# Altium PCB 435MHz_LNA.PcbDoc
Units mil, origin at the board's own origin, x right, y up, seen from the top; angles counter-clockwise.
Board outline 1897.64 x 1078.74 mil, 2 copper layers (Top Layer, Bottom Layer), stack 26.422 mil thick; 58 components, 24 nets, 174 pads, 479 vias.
Unrouted connection lines stored in the file: 1.
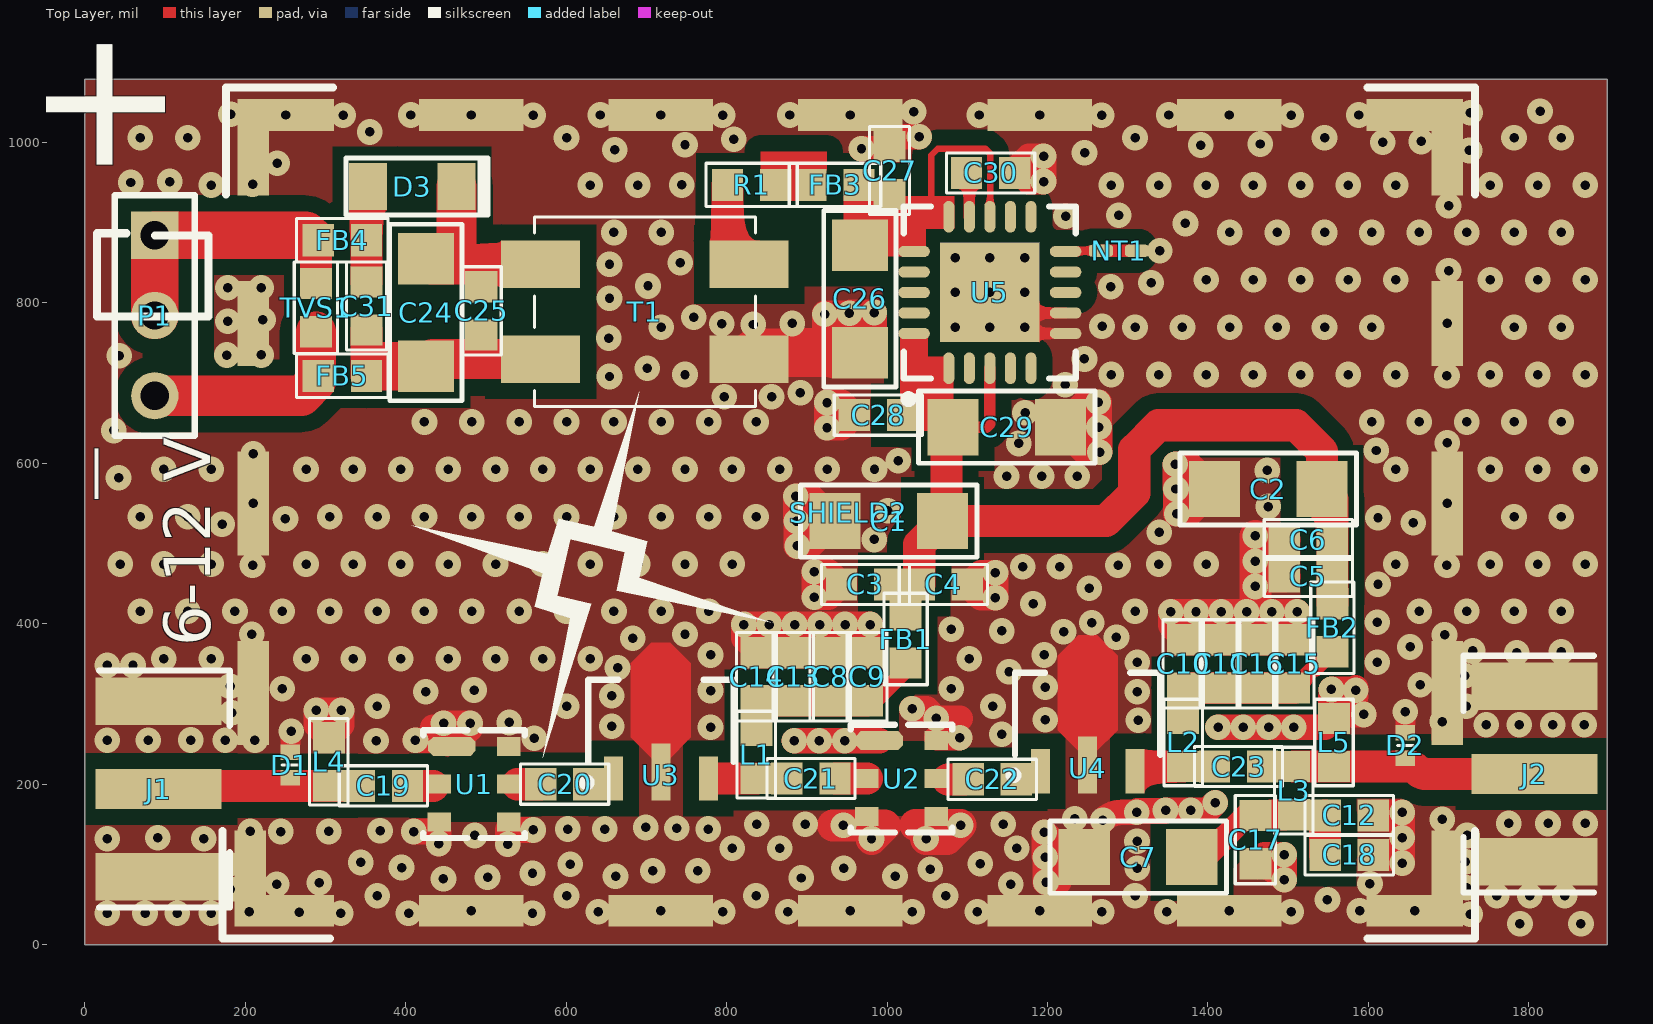
[diagram p0: Top Layer view]
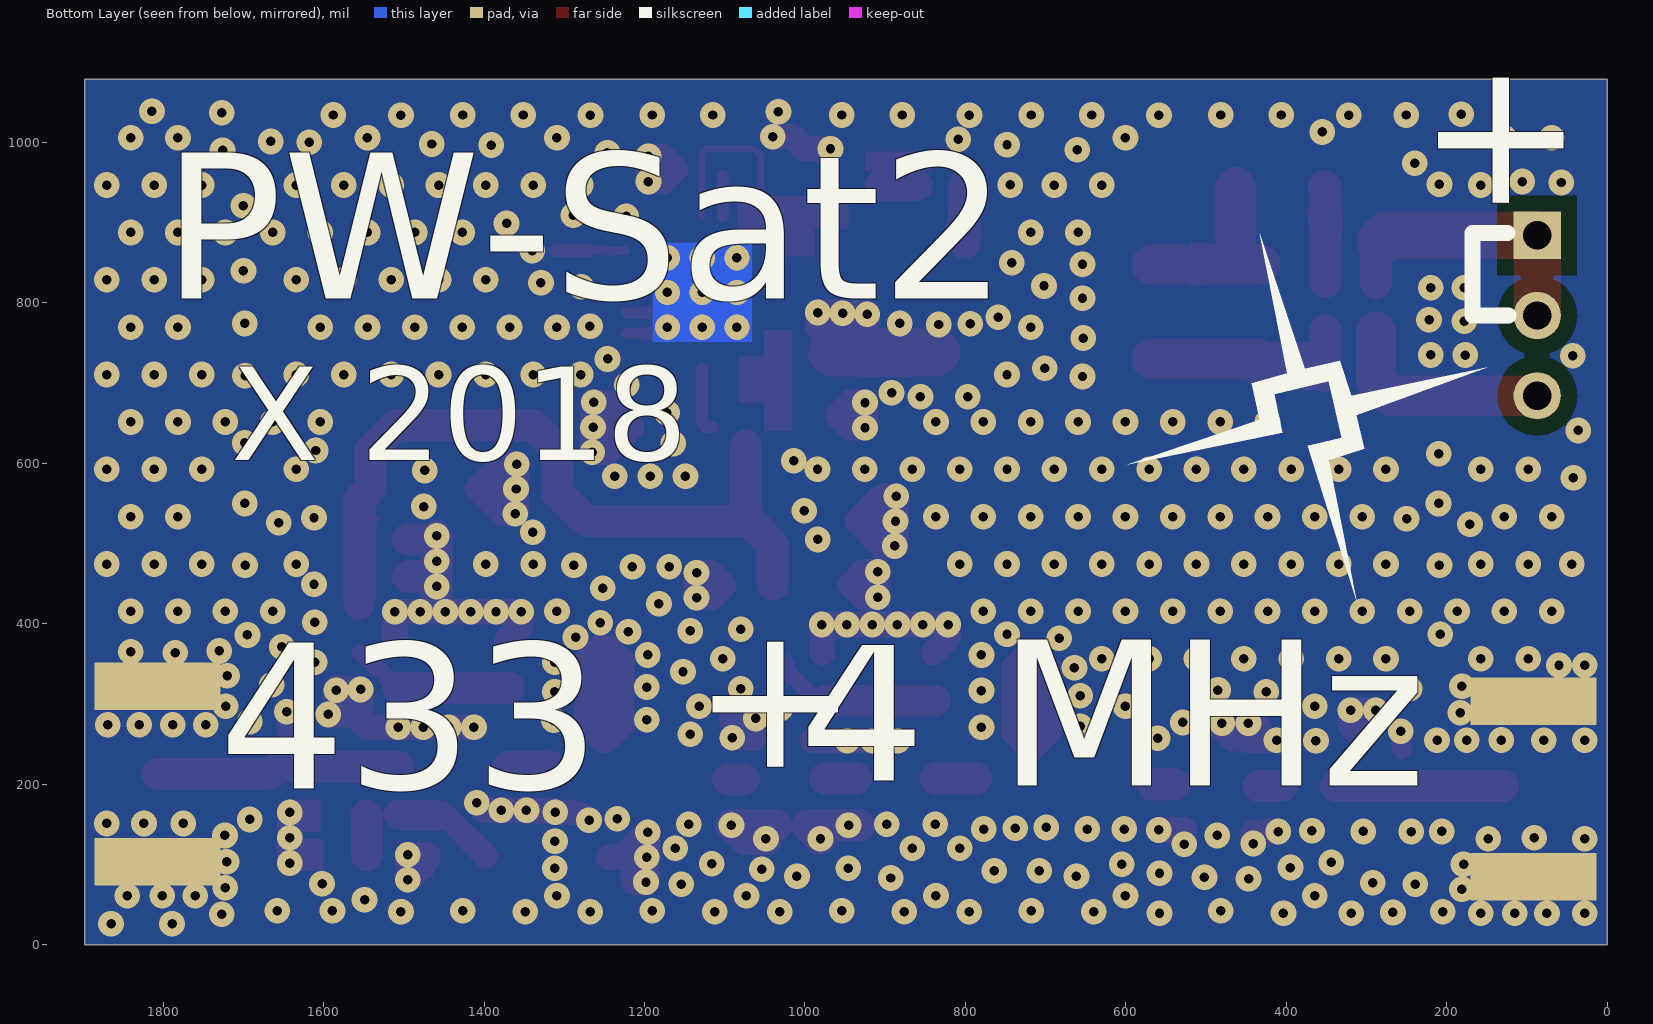
[diagram p1: Bottom Layer view, seen from below]
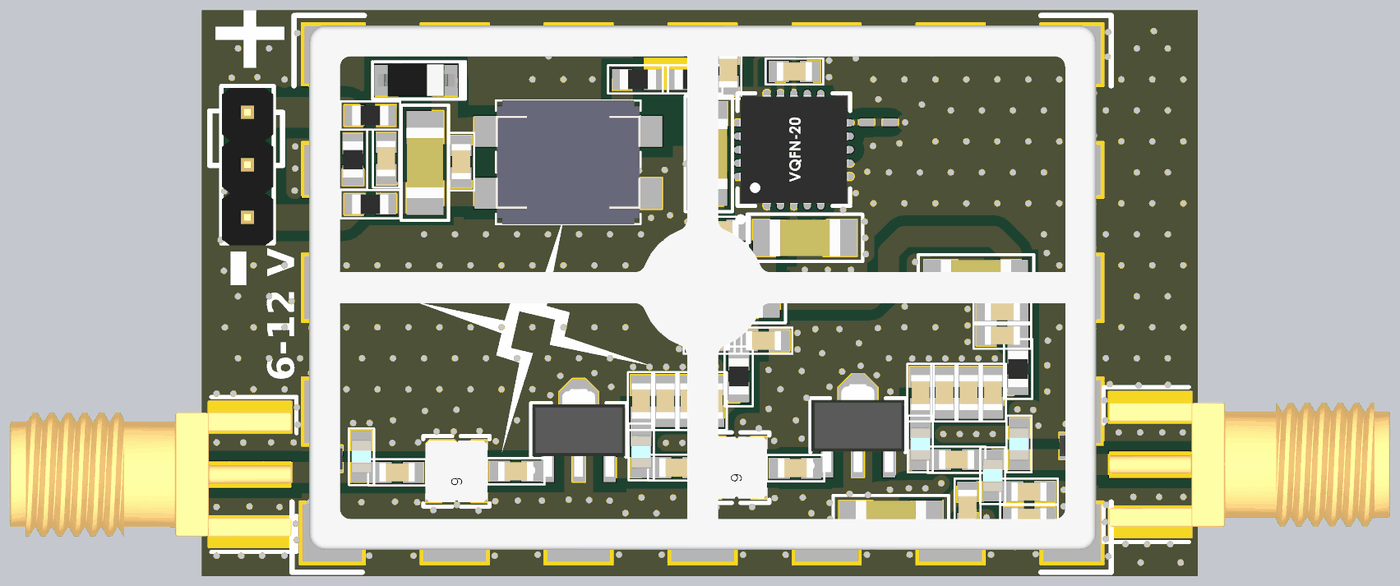
[diagram p2: 3D render of the assembled board from above, using the file's embedded part models]

## Layer stack, top to bottom
Top Solder: solder mask 0.4, Solder Resist, Dk 3.5
Top Layer: signal copper 1.4
Dielectric 1: core 23.622, FR-4, Dk 4.2
Bottom Layer: signal copper 1.4
Bottom Solder: solder mask 0.4, Solder Resist, Dk 3.5

## Board outline
0,0 0,1078.74 1897.64,1078.74 1897.64,0

## Design rules (kind name [scope] priority, off if disabled: settings)
AssemblyTestPointUsage [All] p1 off:
AssemblyTestpoint [All] p1 off: testpointundercomponent=TRUE minsize=40 maxsize=100 preferedsize=60 minholesize=0 maxholesize=40 preferedholesize=32 testpointgrid=1 usegrid=TRUE gridtolerance=0.01 allowsidetop=TRUE allowsidebottom=TRUE
Clearance [All] p1: gap=6 ignorepadtopadclearanceinfootprint=FALSE except(20: Arc-Poly Track-Poly SMDPad-Poly THPad-Poly Via-Poly Fill-Poly Poly-Poly Poly-Region Poly-Text Poly-Hole)
ComponentClearance R3_R4 [InComponent('R3') vs InComponent('R4')] p1: gap=0 collisioncheckmode=3 verticalgap=0 showdistances=FALSE
ComponentClearance R1_R2 [InComponent('R1') vs InComponent('R2')] p2: gap=0 collisioncheckmode=3 verticalgap=0 showdistances=FALSE
ComponentClearance ComponentClearance_PAD_08mm [HasFootprint('PAD_08mm')] p3: gap=0 collisioncheckmode=3 verticalgap=0 showdistances=FALSE
ComponentClearance ComponentClearance_1 [All vs InComponent('J4')] p4: gap=0 collisioncheckmode=3 verticalgap=0 showdistances=FALSE
ComponentClearance [All] p5: gap=10 collisioncheckmode=3 verticalgap=10 showdistances=FALSE
FabricationTestPointUsage [All] p1 off: valid=0 allowmultiple=FALSE
FabricationTestpoint [All] p1 off: side=3 testpointundercomponent=TRUE minsize=40 maxsize=100 preferedsize=60 minholesize=0 maxholesize=40 preferedholesize=32 testpointgrid=1 allowsidetop=TRUE allowsidebottom=TRUE usegrid=TRUE gridtolerance=0.01
Length "InNet('USBDP_CON') Or InNet('USBDM_CON')" [InNet('USBDP_CON') Or InNet('USBDM_CON')] p1: maxlimit=650 minlimit=550
MinimumSolderMaskSliver MSOP8_TSSOP8_3X3 [HasFootprint('MSOP8_TSSOP8_3X3')] p1: minsoldermaskwidth=3
MinimumSolderMaskSliver DFN8_3.0x2.0 [HasFootprint('DFN8_3.0x2.0')] p2: minsoldermaskwidth=3
MinimumSolderMaskSliver 6L2MM [HasFootprint('6L2MM')] p3: minsoldermaskwidth=3
MinimumSolderMaskSliver QFN16_3x3 [HasFootprint('QFN16_3x3')] p4: minsoldermaskwidth=3
MinimumSolderMaskSliver 0915LP15B026 [HasFootprint('0915LP15B026')] p5: minsoldermaskwidth=3
MinimumSolderMaskSliver PD0810J5050S2HF [HasFootprint('PD0810J5050S2HF')] p6: minsoldermaskwidth=3
MinimumSolderMaskSliver [All] p7: minsoldermaskwidth=6
PlaneClearance [All] p1: clearance=9.84
PlaneConnect PlaneConnect_via [All] p1: planeconnectstyle=Direct reliefexpansion=20 reliefentries=4 reliefconductorwidth=10 reliefairgap=10
PlaneConnect [All] p2: planeconnectstyle=Relief reliefexpansion=20 reliefentries=4 reliefconductorwidth=10 reliefairgap=10
PolygonConnect PolygonConnect_1 [HasFootprint('BMI-S-205-F')] p1: connectstyle=Direct reliefconductorwidth=10 reliefentries=4 polygonreliefangle="90 Angle" airgapwidth=10
PolygonConnect PolygonConnect_via [isVia] p2: connectstyle=Direct reliefconductorwidth=10 reliefentries=4 polygonreliefangle="90 Angle" airgapwidth=10
PolygonConnect [All] p3: connectstyle=Direct reliefconductorwidth=20 reliefentries=4 polygonreliefangle="90 Angle" airgapwidth=12
RoutingVias [All] p1: holewidth=5.91 width=21.65 viastyle="Through Hole" minholewidth=7.87 minwidth=23.62 maxholewidth=39.37 maxwidth=50
SilkToSilkClearance [All] p1: silktosilkclearance=1
SilkToSolderMaskClearance [IsPad] p1: minsilkscreentomaskgap=0 clearancetoexposedcopper=TRUE
SolderMaskExpansion [All] p1: expansion=2
Width Width_50ohm [InNetClass('50 ohm')] p1: maxlimit=40 minlimit=40 preferedwidth=40 bottomlayer_minwidth=0 bottomlayer_maxwidth=0 bottomlayer_prefwidth=0 minimp=40.000000 maximp=69.000000 favimp=50.000000
Width [All] p2: maxlimit=118.11 minlimit=5.91 preferedwidth=9.84
20 further rules are at their usual default settings.

## Classes and differential pairs
net class "50 ohm": NetC19_1 NetC19_2 NetC20_1 NetC20_2 NetC21_1 NetC21_2 NetC22_1 NetC22_2 NetC23_1 NetC23_2

## Components (designator, comment, footprint, x,y, rotation, side; value= is the part's Value field where it differs from the comment)
C1 "Ceramic X7R" C_1206_3216 1002.13,527.91 r180 top value=10uF
C2 "Ceramic X7R" C_1206_3216 1475.13,567.91 r180 top value=10uF
C3 "Ceramic X7R" C_0603_1608 973.13,448.91 r0 top value=1uF
C4 "Ceramic C0G" C_0603_1608 1070.13,448.91 r0 top value=1nF
C5 "Ceramic X7R" C_0603_1608 1525.13,458.91 r0 top value=1uF
C6 "Ceramic C0G" C_0603_1608 1525.13,504.91 r180 top value=1nF
C7 "Ceramic X7R" C_1206_3216 1313,109 r0 top value=10uF
C8 "Ceramic C0G" C_0603_1608 929.13,333.91 r270 top value=100pF
C9 "Ceramic X7R" C_0603_1608 975.13,333.91 r90 top value=1uF
C10 "Ceramic C0G" C_0603_1608 1369.13,349.91 r270 top value=100pF
C11 "Ceramic X7R" C_0603_1608 1415.13,349.91 r90 top value=1uF
C12 "Ceramic X7R" C_0603_1608 1576.13,160.91 r0 top value=1uF
C13 "Ceramic C0G" C_0603_1608 883.13,333.91 r270 top value=1nF
C14 "Ceramic X7R" C_0603_1608 837.13,333.91 r90 top value=100nF
C15 "Ceramic C0G" C_0603_1608 1507.13,349.91 r270 top value=1nF
C16 "Ceramic X7R" C_0603_1608 1461.13,349.91 r90 top value=100nF
C17 "Ceramic C0G" C_0603_1608 1459.13,130.91 r90 top value=1nF
C18 "Ceramic X7R" C_0603_1608 1576.13,111.91 r0 top value=100nF
C19 "Ceramic C0G" C_0603_1608 372.13,197.91 r0 top value=100pF
C20 "Ceramic C0G" C_0603_1608 598.13,199.91 r0 top value=100pF
C21 "Ceramic C0G" C_0603_1608 905.13,206.91 r0 top value=100pF
C22 "Ceramic C0G" C_0603_1608 1131.13,206.04 r0 top value=100pF
C23 "Ceramic C0G" C_0603_1608 1438.13,221.91 r0 top value=100pF
C24 "Ceramic X7R" C_1206_3216 425.13,787.91 r270 top value=10uF
C25 "Ceramic X7R" C_0603_1608 494.13,789.91 r270 top value=100nF
C26 "Ceramic X7R" C_1206_3216 966.13,804.91 r270 top value=10uF
C27 "Ceramic X7R" C_0603_1608 1003.13,964.91 r90 top value=100nF
C28 "Ceramic X7R" C_0603_1608 989.13,659.91 r180 top value=100nF
C29 "Ceramic X7R" C_1206_3216 1149.13,644.91 r0 top value=10uF
C30 "Ceramic X7R" C_0603_1608 1129.13,961.91 r0 top value=1uF
C31 "Ceramic C0G" C_0603_1608 351,796 r270 top value=100pF
D1 "ESD Suppressors / TVS Diodes" D_BI_0402_1005 256.13,223.73 r90 top value=PS04LTVA1
D2 "ESD Suppressors / TVS Diodes" D_BI_0402_1005 1646.13,248.21 r90 top value=PS04LTVA1
D3 "1N4148W" SOD123 408,945 r180 top value=LL4148
FB1 "Ferrite bead" FB_0603_1608 1023.13,380.91 r270 top value=BLM18AG601SN1
FB2 "Ferrite bead" FB_0603_1608 1555.13,394.91 r270 top value=BLM18AG601SN1
FB3 "Ferrite bead" FB_0603_1608 935.13,946.91 r0 top value=BLM18AG601SN1
FB4 "Ferrite bead" FB_0603_1608 321,878 r0 top value=BLM18AG601SN1
FB5 "Ferrite bead" FB_0603_1608 321,709 r180 top value=BLM18AG601SN1
J1 "SMA EDGE" J_SMA_EDGE_6.25 13.13,193.91 r0 top value=RF2-143-T-17-50-G
J2 "SMA EDGE" J_SMA_EDGE_6.25 1885.83,212.6 r180 top value=RF2-143-T-17-50-G
L1 "L" L_0603_1608 837.13,236.91 r90 top value=NC
L2 "L" L_0603_1608 1369.13,251.91 r90 top value=NC
L3 "L" L_0603_1608 1507.13,191.91 r270 top value=NC
L4 "Inductor" L_0603_1608 304.13,227.91 r270 top value=100nH
L5 "Inductor" L_0603_1608 1557.13,251.91 r270 top value=100nH
NT1 "NETTIE 15MIL" NT_15MIL 1289.13,864.91 r180 top net-tie value=NT_15MIL
P1 "Goldpin" P_HEADER_1x3_2.54 87.15,884.18 r270 top value=DS1021-1*3SF1-1
R1 "Resistor" R_0603_1608 831.13,946.91 r0 top value=0R
SHIELD1 "EMI Shield Cover" BMI-S-205-C 1976,3152 r180 top value=BMI-S-205-C
SHIELD2 "EMI Shield" BMI-S-205-F 954.22,549.91 r0 top locked value=BMI-S-205-F
T1 "Common mode filter" ACM7060 698.13,788.91 r0 top value=ACM7060-301-2PL-TL
TVS1 "0603ESDA2" R_0603_1608 288,794 r270 top value=0603ESDA2-TR2
U1 "TA0649A" SAW_DCC6_SM3030-6_3x3 485.13,199.91 r270 top
U2 "TA0649A" SAW_DCC6_SM3030-6_3x3 1018.13,206.91 r270 top
U3 "PGA103+" SOT89_TO-243AA_N 718.13,277.97 r0 top value=PGA-103+
U4 "PGA103+" SOT89_TO-243AA_N 1250.13,286.91 r0 top value=PGA-103+
U5 "TPS7A4701RGWR" QFN20_5x5 1128.13,812.91 r90 top

## Footprints (in the part's own frame and the unit in brackets; to place one, negate y for a bottom-side part, rotate by r counter-clockwise, add the part's x,y. Pads: shape width x height; smd on the part's side, far side on the other; paste and mask are expansions set on the pad)
ACM7060 [mm] "TDK Common Mode Filters ACM7060 Series"
  rect 2.5x1.5 smd: 1(-3.3,1.5) 2(-3.3,-1.5) 3(3.3,-1.5) 4(3.3,1.5)
  silkscreen extent -3.5,-3 3.5,3, body extent -3.5,-3 3.5,3, height 3.5
BMI-S-205-C [mil]
  body extent -759,-509 759,509, height 256
BMI-S-205-F [mm]
  rect 1x3.05 smd paste-0.127: 1(-19,-11.875) 1(-18.9,11.275) 1(18.9,-11.875) 1(18.9,11.275)
  rect 1x3.3 smd paste-0.127: 1(-18.9,-6) 1(-18.9,0) 1(18.9,-6) 1(18.9,0)
  rect 1x2.7 smd paste-0.127: 1(-18.9,5.7) 1(18.9,5.7)
  rect 3.15x1 smd paste-0.127: 1(-17.925,-12.9)
  rect 3.05x1 smd paste-0.127: 1(-17.875,12.3) 1(17.875,-12.9) 1(17.875,12.3)
  rect 3.3x1 smd paste-0.127: 1(-12,-12.9) 1(-12,12.3) 1(-6,-12.9) 1(-6,12.3) 1(0,-12.9) 1(0,12.3) 1(6,-12.9) 1(6,12.3) 1(12,-12.9) 1(12,12.3)
  silkscreen extent -19.87,-13.78 19.77,13.18, body extent -19.05,-12.7 19.05,12.7, height 6
C_0603_1608 [mil]
  rect 39x40 smd: 1(-30,0) 2(30,0)
  silkscreen extent -55,-25 55,25, body extent -33,-18 33,18, height 35
C_1206_3216 [mil]
  rect 64x70 smd: 1(-67,0) 2(67,0)
  silkscreen extent -110,-45 110,45, body extent -67,-35 67,35, height 39
D_BI_0402_1005 [mm]
  rect 0.49x0.62 smd: 1(-0.405,0) 2(0.405,0)
  silkscreen extent 0,-0.25 0,0.25, body extent -0.5,-0.3 0.5,0.3, height 0.48
FB_0603_1608 [mil]
  rect 39x40 smd: 1(-30,0) 2(30,0)
  silkscreen extent -57,-27 57,27, body extent -34,-19 34,19, height 21
J_SMA_EDGE_6.25 [mm]
  rect 4x1.27 smd paste-5: 1(2,0)
  rect 4x1.5 smd paste-5: 2(2,-2.775) 2(2,2.775)
  rect 4x1.5 smd far side paste-5: 2(2,-2.775) 2(2,2.775)
  silkscreen extent 0.13,-3.75 4.25,3.75, body extent -9.6,-3 4,3, height 3.5
L_0603_1608 [mil]
  rect 39x40 smd: 1(-30,0) 2(30,0)
  silkscreen extent -54,-24 54,24, body extent -31,-20 32,20, height 31
NT_15MIL [mil]
  rrect50% 30x15 smd: 1(-22.5,0) 2(22.5,0)
  Top Layer lines w15: 22.5,0 -22.5,0
P_HEADER_1x3_2.54 [mm] "Connector; Header; 3 Position, Male"
  rect 1.5x1.5 hole 0.9: 1(0,0)
  round 1.5 hole 0.9: 2(2.54,0) 3(5.08,0)
  silkscreen extent -1.27,-1.27 6.35,1.27, body extent -1.17,-1.25 6.45,1.25, height 8.2
QFN20_5x5 [mm] "QFN, 20-Leads, Body 5,00x5,00mm, Pitch 0,65mm, Thermal Pad 3,15x3,15mm, IPC Medium Density"
  oval 1x0.35 smd: 1(-2.4,1.3) 2(-2.4,0.65) 3(-2.4,0) 4(-2.4,-0.65) 5(-2.4,-1.3) 11(2.4,-1.3) 12(2.4,-0.65) 13(2.4,0) 14(2.4,0.65) 15(2.4,1.3)
  oval 0.35x1 smd: 6(-1.3,-2.4) 7(-0.65,-2.4) 8(0,-2.4) 9(0.65,-2.4) 10(1.3,-2.4) 16(1.3,2.4) 17(0.65,2.4) 18(0,2.4) 19(-0.65,2.4) 20(-1.3,2.4)
  rect 3.15x3.15 smd: 21(0,0)
  Bottom Layer region: -1.575,-1.575 1.575,-1.575 1.575,1.575 -1.575,1.575
  silkscreen extent -3.5,-2.72 2.73,2.73, body extent -2.62,-2.62 2.63,2.63, height 1.05
R_0603_1608 [mil]
  rect 39x40 smd: 1(-30,0) 2(30,0)
  silkscreen extent -57,-27 57,27, body extent -34,-19 34,19, height 21
SAW_DCC6_SM3030-6_3x3 [mm]
  oct 0.6x1.5 smd: 1(-1.2,-0.7)
  rect 0.6x0.75 smd: 2(0,-1.1) 3(1.2,-1.1) 4(1.2,1.1) 5(0,1.1) 6(-1.2,1.1)
  silkscreen extent -1.71,-1.61 1.71,1.61, body extent -1.5,-1.5 1.5,1.5, height 1.14
SOD123 [mm]
  rect 1.2x1.5 smd: 1(-1.4,0) 2(1.4,0)
  silkscreen extent -2.4,-0.9 2.1,0.9, body extent -1.86,-0.81 1.84,0.79, height 1.27
SOT89_TO-243AA_N [mm] "SOT89, 3-Leads, Body 4,50x2,45mm, Pitch 1,50mm, Lead Span 4,1mm, IPC Medium Density"
  rect 0.6x1.4 smd: 1(-1.5,-1.8) 3(1.5,-1.8)
  rect 0.6x1.8 smd: 2(0,-1.6)
  Top Layer region: -0.228,-1.219 -0.95,-0.498 -0.95,1.85 -0.3,2.5 0.3,2.5 0.95,1.85 0.95,-0.498 0.229,-1.219
  silkscreen extent -2.47,-2.05 2.3,1.32, body extent -2.25,-2.25 2.25,2, height 1.59

## Part data
C1 C2 C7 C24 C26 C29: library part C_10uF_25V_X7R_1206_10, "Capacitor", Dielectric=X7R, Manufacturer="Samsung Electro-Mechanics", Manufacturer Part Number=CL31B106KAHNNNE, Tolerance (%)=10, Voltage=25V, HelpURL=http://www.tme.eu/pl/Document/4a42202b32dab16128fe107dd69598cc/samsung-chip-cap.pdf, Part Number=C_10uF_25V_X7R_1206_10, SCH_Footprint=1206, Supplier 1=TME, Supplier 2="RS Components", Supplier 3=Farnell, Supplier 4=Mouser, Supplier 5=Digi-Key, Supplier Part Number 1=CL31B106KAHNNNE
C3 C5 C9 C11 C12 C30: library part C_1uF_25V_X7R_0603_10, "Capacitor", Dielectric=X7R, Manufacturer=Samsung, Manufacturer Part Number=CL10B105KA8NNNC, Tolerance (%)=10, Voltage=25V, HelpURL=http://www.tme.eu/pl/Document/4a42202b32dab16128fe107dd69598cc/samsung-chip-cap.pdf, Part Number=C_1uF_25V_X7R_0603_10, SCH_Footprint=0603, Supplier 1=TME, Supplier 2="RS Components", Supplier 3=Farnell, Supplier 4=Mouser, Supplier 5=Digi-Key, Supplier Part Number 1=CL10B105KA8NNNC
C4 C6 C13 C15 C17: library part C_1nF_50V_C0G_0603_5, "Capacitor", Dielectric=C0G, Manufacturer=Samsung, Manufacturer Part Number=CL10C102JB8NNNC, Tolerance (%)=5, Voltage=50V, HelpURL=http://www.tme.eu/pl/Document/7da762c1dbaf553c64ad9c40d3603826/mlcc_samsung.pdf, Part Number=C_1nF_50V_C0G_0603_5, SCH_Footprint=0603, Supplier 1=TME, Supplier 2="RS Components", Supplier 3=Farnell, Supplier 4=Mouser, Supplier 5=Digi-Key, Supplier Part Number 1=CL10C102JB8NNNC
C8 C10 C19 C20 C21 C22 C23 C31: library part C_100pF_50V_C0G_0603_5, "Capacitor", Dielectric=C0G, Manufacturer=AVX, Manufacturer Part Number=06035A101JAT2A, Tolerance (%)=5, Voltage=50V, HelpURL=http://www.tme.eu/pl/Document/28556c2a4dfa60995042b7f5f1edb9ed/AVX-C0G.pdf, Part Number=C_100pF_50V_C0G_0603_5, SCH_Footprint=0603, Supplier 1=TME, Supplier 2="RS Components", Supplier 3=Farnell, Supplier 4=Mouser, Supplier 5=Digi-Key, Supplier Part Number 1=06035A101JAT2A
C14 C16 C18 C25 C27 C28: library part C_100nF_50V_X7R_0603_5, "Capacitor", Dielectric=X7R, Manufacturer=Samsung, Manufacturer Part Number=CL10B104JB8NNNC, Tolerance (%)=5, Voltage=50V, HelpURL=http://www.tme.eu/pl/Document/4a42202b32dab16128fe107dd69598cc/samsung-chip-cap.pdf, Part Number=C_100nF_50V_X7R_0603_5, SCH_Footprint=0603, Supplier 1=TME, Supplier 2="RS Components", Supplier 3=Farnell, Supplier 4=Mouser, Supplier 5=Digi-Key, Supplier Part Number 1=CL10B104JB8NNNC
D1 D2: library part TVS_PS04LTVA1, Manufacturer=Bussmann, Manufacturer Part Number=PS04LTVA1, Voltage=12V, HelpURL=https://pl.mouser.com/datasheet/2/87/31fc02c3-c2a7-4757-9ba5-5a4597d899a4-33212.pdf, Part Number=TVS_PS04LTVA1, SCH_Footprint=0402, Supplier 1=TME, Supplier 2="RS Components", Supplier 3=Farnell, Supplier 4=Mouser, Supplier 5=Digi-Key, Supplier Part Number 4=504-PS04LTVA1
D3: library part D_1N4148W_0A15_75V_SOD123, Current=0A15, Manufacturer="Fairchild Semiconductor", Manufacturer Part Number=LL4148, Voltage=75V, Part Number=D_1N4148W_0A15_75V_SOD123, SCH_Footprint=SOD123, Supplier 1=TME, Supplier 2="RS Components", Supplier 3=Farnell, Supplier 4=Mouser, Supplier 5=Digi-Key, Supplier Part Number 4=771-PMLL4148L-T/R, Supplier Part Number 5=LL4148FSCT
FB1 FB2 FB3 FB4 FB5: library part FB_BLM18AG601SN1, "Ferrite Bead", Current=0A5, Manufacturer=Murata, Manufacturer Part Number=BLM18AG601SN1D, Resistance=600R, HelpURL=http://datasheet.octopart.com/BLM18AG601SN1D-Murata-datasheet-11743096.pdf, Part Number=FB_BLM18AG601SN1, SCH_Footprint=0603, Supplier 1=TME, Supplier 2="RS Components", Supplier 3=Farnell, Supplier 4=Mouser, Supplier 5=Digi-Key, Supplier Part Number 2=7241299P, Supplier Part Number 3=1515679, Supplier Part Number 4=81-BLM11A601S, Supplier Part Number 5=490-1014-1-ND
J1 J2: library part J_SMA_EDGE_6.25, "SMA connector", Manufacturer="Adam Tech", Manufacturer Part Number=RF2-143-T-17-50-G, Component Type=Standard, HelpURL=http://www.tme.eu/pl/Document/5895dbb620da9c3499391e7670c4adea/RF2-143-T-17-50-G.pdf, Part Number=J_SMA_EDGE_6.25, SCH_Footprint="SMA EDGE", Supplier 1=TME, Supplier 2="RS Components", Supplier 3=Farnell, Supplier 4=Mouser, Supplier 5=Digi-Key, Supplier Part Number 1=RF2-143-T-17-50-G
L1 L2 L3: library part L_0603, "Induction", Part Number=L_0603, SCH_Footprint=0603, Supplier 1=TME, Supplier 2="RS Components", Supplier 3=Farnell, Supplier 4=Mouser, Supplier 5=Digi-Key
L4 L5: library part L_100NH_0A3_0603, "Induction", Current=0A3, Manufacturer=Bourns, Manufacturer Part Number=CI160808-R10J, Resistance=1R7, HelpURL=https://datasheet.octopart.com/CI160808-8N2J-Bourns-datasheet-2719.pdf, Part Number=L_100NH_0A3_0603, SCH_Footprint=0603, Supplier 1=TME, Supplier 2="RS Components", Supplier 3=Farnell, Supplier 4=Mouser, Supplier 5=Digi-Key
NT1: library part NT_15MIL, Component Type="Net Tie (No BOM)", Part Number=NT_15MIL, SCH_Footprint=SMD, Supplier 1=TME, Supplier 2="RS Components", Supplier 3=Farnell, Supplier 4=Mouser, Supplier 5=Digi-Key
P1: library part P_HEADER_1x3_2.54, "Header, 3-Pin", Manufacturer=Connfly, Manufacturer Part Number=DS1021-1*3SF1-1, Supplier Part Number 1=ZL201-03G, Component Type=Standard, HelpURL=http://www.tme.eu/en/Document/cc301e58a5da78cb543a94b5a5b7f06a/DS1021.pdf, Part Number=P_HEADER_1x3_2.54, SCH_Footprint="1x3 2.54mm", Supplier 1=TME, Supplier 2="RS Components", Supplier 3=Farnell, Supplier 4=Mouser, Supplier 5=Digi-Key
R1: library part R_0R_0603, Manufacturer Part Number=RC1608J000CS, Part Number=R_0R_0603, SCH_Footprint=0603, Supplier 1=TME, Supplier 2="RS Components", Supplier 3=Farnell, Supplier 4=Mouser, Supplier 5=Digi-Key, Supplier Part Number 5=1276-3510-1-ND
SHIELD1: library part SHIELD_BMI-S-205-C, "Shield, 1 pad", Manufacturer=Laird, Manufacturer Part Number=BMI-S-205-C, HelpURL=https://assets.lairdtech.com/home/brandworld/files/Board%20Level%20Shields%20Catalog%20Download.pdf, Part Number=SHIELD_BMI-S-205-C, SCH_Footprint=38.1x25.4mm, Supplier 1=TME, Supplier 2="RS Components", Supplier 3=Farnell, Supplier 4=Mouser, Supplier 5=Digi-Key, Supplier Part Number 3=2497722, Supplier Part Number 4=739-BMIS-205-C, Supplier Part Number 5=903-1017-ND
SHIELD2: library part SHIELD_BMI-S-205-F, "Shield, 1 pad", Manufacturer=Laird, Manufacturer Part Number=BMI-S-205-F, HelpURL=https://assets.lairdtech.com/home/brandworld/files/Board%20Level%20Shields%20Catalog%20Download.pdf, Part Number=SHIELD_BMI-S-205-F, SCH_Footprint=38.1x25.4mm, Supplier 1=TME, Supplier 2="RS Components", Supplier 3=Farnell, Supplier 4=Mouser, Supplier 5=Digi-Key, Supplier Part Number 3=2497723, Supplier Part Number 4=739-BMIS-205-F, Supplier Part Number 5=903-1054-1-ND
T1: library part ACM7060-301-2PL-TL, "TDK ACM7060 common mode filter", Current=5, Manufacturer=TDK, Resistance=0.01R, Voltage=80, HelpURL=https://pl.mouser.com/datasheet/2/400/mf_commercial_power_acm7060_en-837183.pdf, Manufacturer Part Number=ACM7060-301-2PL-TL, Part Number=ACM7060-301-2PL-TL, SCH_Footprint=ACM7060, Supplier 1=TME, Supplier 2="RS Components", Supplier 3=Farnell, Supplier 4=Mouser, Supplier 5=Digi-Key, Supplier Part Number 3=1503723, Supplier Part Number 4=810-ACM70603012PLTL, Supplier Part Number 5=445-2214-1-ND
TVS1: library part TVS_0603ESDA2, Current=30A, Manufacturer=Bussmann, Manufacturer Part Number=0603ESDA2-TR2, Voltage=14V, HelpURL=http://www.cooperindustries.com/content/dam/public/bussmann/Electronics/Resources/product-datasheets/bus-elx-ds-4419-0603esda2-tr2.pdf, Part Number=TVS_0603ESDA2, SCH_Footprint=0603, Supplier 1=TME, Supplier 2="RS Components", Supplier 3=Farnell, Supplier 4=Mouser, Supplier 5=Digi-Key, Supplier Part Number 1=0603ESDA2-TR2, Supplier Part Number 4=504-0603ESDA2-TR2, Supplier Part Number 5=283-4156-1-ND
U1 U2: library part U_TA0649A, Center Frequency (MHz)=433.92, Manufacturer=Tai-Saw, Max Power (dBm)=10, Bandwidth (MHz)=8, HelpURL=https://www.golledge.com/media/2065/ma09182.pdf, Manufacturer Part Number=TA0649A, Part Number=U_TA0649A, SCH_Footprint=SM3030, Supplier 1=TME, Supplier 2="RS Components", Supplier 3=Farnell, Supplier 4=Mouser, Supplier 5=Digi-Key
U3 U4: library part U_PGA103+, Manufacturer=Mini-Circuits, Manufacturer Part Number=PGA-103+, HelpURL=https://ww2.minicircuits.com/pdfs/PGA-103+.pdf, Part Number=U_PGA103+, SCH_Footprint=SOT89, Supplier 1=TME, Supplier 2="RS Components", Supplier 3=Farnell, Supplier 4=Mouser, Supplier 5=Digi-Key
U5: library part VL_TPS7A4701RGWR_ADJ_1A, "RF LDO Voltage Regulator", Current=1A, Manufacturer="Texas Instruments", Voltage=ADJ, HelpURL=http://www.ti.com/lit/ds/symlink/tps7a47.pdf, Manufacturer Part Number=TPS7A4701RGWR, Part Number=VL_TPS7A4701RGWR_ADJ_1A, SCH_Footprint=VQFN20, Supplier 1=TME, Supplier 2="RS Components", Supplier 3=Farnell, Supplier 4=Mouser, Supplier 5=Digi-Key, Supplier Part Number 3=2542798, Supplier Part Number 4=595-TPS7A4701RGWR, Supplier Part Number 5=296-37224-1-ND

## Via types
v1: diameter 32, hole 11.81, Top Layer to Bottom Layer, tented both sides, 470 vias
v2: diameter 31.5, hole 11.81, Top Layer to Bottom Layer, tented bottom, 9 vias

## Nets (pads, with @x,y where several pads share a name; then routed paths per layer and width w, separated by ;. In a path a pad name is that pad's centre, name@x,y a point inside that pad or via, vN(x,y) a via of type N, cw(c..) or ccw(c..) an arc to the next point about the centre after c; other vN are vias at no path point)
+5V: C1.1 C2.1 C3.2 C4.1 C5.2 C6.1 C28.1 C29.1 FB1.1 FB2.1 U5.1 U5.3 U5.20 | length 1028.1
  Top Layer w14: 1114.13,644.91 1124.13,644.91 1128.13,648.91 U5.3
  Top Layer w40: C4.1 1040.13,498.91 C1.1 1273.13,527.91 1308.13,562.91 1308.13,616.91 1338.57,647.36 1509.68,647.36 1542.13,614.91 C2.1 1555.13,554.91 C6.1 C5.2 FB2.1 ; C1.1@1074.13,532.91 C29.1@1074.13,621.91
GND: C1.2 C2.2 C3.1 C4.2 C5.1 C6.2 C7.1 C8.1 C9.2 C10.1 C11.2 C12.2 C13.1 C14.2 C15.1 C16.2 C17.1 C18.2 C26.2 C27.2 C28.2 C29.2 C30.2 D1.2 D2.2 J1.2 J2.2 L4.1 L5.1 NT1.1 SHIELD2.1 T1.3 U1.1 U1.3 U1.4 U1.6 U2.1 U2.3 U2.4 U2.6 U3.2 U4.2 U5.6 U5.7 U5.21 | length 4035.2
  Top Layer w14: U5.21@1153.72,787.32 U5.7 ; U5.21@1179.31,761.73 U5.6
  Top Layer w24: D1.2@256.13,242.98 v1@256.13,264.73 ; D2.2@1646.13,267.21 v1(1646.13,290.21)
  Top Layer w32: v1(410.13,140.91) 426.13,140.91 ; v1(412.13,254.91) 449.81,254.91 v1@433.76,270.97 ; v1(441.13,125.91) v1@441.13,139.91 ; v1(447.13,275.91) v1(480.13,275.91) 480.13,268.91 U1.1@467.13,255.91 ; v1(527.13,124.91) U1.4@527.13,142.91 ; U1.4@538.19,142.91 v1(559.13,142.91) ; C14.2@839.65,363.91 821.65,381.91 v1(821.65,398.91) v1(853.14,398.91) v1(884.64,398.91) v1(916.13,398.91) v1(947.63,398.91) v1(979.13,398.91) 979.13,365.39 C9.2@977.65,363.91 ; v1(884.13,254.16) v1(915.63,254.16) v1(947.13,254.16) U2.1 ; v1@887.13,496.91 v1(887.13,527.91) ; v1(888.13,496.91) C1.2@904.13,496.91 ; v1(922.13,785.91) 922.13,769.91 ; v1@922.13,786.91 v1(953.13,786.91) ; v1(968.13,991.91) 1000.13,991.91 C27.2 1015.13,1006.91 v1(1040.13,1006.91) ; v1(1031.13,293.91) 1049.13,293.91 v1(1061.13,281.91) 1090.85,281.91 ; U2.6@1062.19,257.91 v1(1090.62,257.91) ; v1@1197.13,77.91 v1(1197.13,108.91) ; v1(1198.13,77.91) 1214.13,77.91 1214.13,91.91 v1(1197.13,108.91) ; C7.1@1245.13,108.91 1227.13,108.91 v1(1196.13,139.91) 1196.13,109.91 v1(1197.13,108.91) ; v1(1263.13,675.91) C29.2@1247.13,675.91 ; v1@1264.13,675.91 v1(1264.13,644.91) ; v1(1269.16,155) cw(c1293.09,131.07) 1293.09,164.91 v1(1311.13,164.91) 1311.13,165.91 1311.69,166.48 1346.04,166.48 v1(1347.13,167.57) v1(1378.62,167.57) 1399.78,167.57 v1(1409.13,176.91) ; v1@1360.13,536.91 v1(1360.13,567.91) ; v1(1361.13,536.91) C2.2@1377.13,536.91 ; C10.1@1371.65,379.91 1353.65,397.91 v1(1353.65,414.91) v1(1385.14,414.91) v1(1416.64,414.91) v1(1448.13,414.91) v1(1479.63,414.91) v1(1511.13,414.91) 1511.13,381.39 C15.1@1509.65,379.91 ; v1(1412.63,270.91) v1(1444.13,270.91) v1(1475.62,270.91) v1(1507.12,270.91) 1546.13,270.91 L5.1@1554,278.79 ; L5.1 L5.1@1554,278.79 ; v1@1584.13,308.91 1562.13,286.91 v1(1594.13,286.91) ; v1@1584.13,319.91 1582.21,318 v1(1554,318) L5.1@1554,278.79 ; v1(1642.13,101.67) v1(1642.13,133.17) v1(1642.13,164.66) ; v1(886.13,558.91) 904.13,558.91 C1.2 ; v1(886.13,558.91) 917.13,527.91 C1.2 ; v1(886.13,558.91) 886.13,528.91 v1(887.13,527.91) ; v1(887.13,527.91) 904.13,510.91 C1.2@904.13,496.91 ; C1.2@904.13,496.91 C1.2 ; 922.13,769.91 936.13,769.91 v1(953.13,786.91) ; 922.13,769.91 C26.2@953.13,738.91 ; C26.2@953.13,738.91 984.13,769.91 v1(984.13,787.91) ; C26.2@953.13,738.91 953.13,756.91 v1(984.13,787.91) ; v1(953.13,786.91) 954.13,787.91 v1(984.13,787.91) ; C29.2 1234.13,644.91 v1(1265.13,613.91) ; C29.2 1247.13,613.91 v1(1265.13,613.91) ; C29.2 C29.2@1247.13,675.91 ; C29.2@1247.13,675.91 1247.13,661.91 v1(1264.13,644.91) ; v1(1264.13,644.91) 1265.13,643.91 v1(1265.13,613.91) ; v1(1359.13,598.91) 1377.13,598.91 C2.2 ; v1(1359.13,598.91) 1390.13,567.91 C2.2 ; v1(1359.13,598.91) 1359.13,568.91 v1(1360.13,567.91) ; v1(1360.13,567.91) 1377.13,550.91 C2.2@1377.13,536.91 ; C2.2@1377.13,536.91 C2.2 ; L4.1@288.38,273.66 v1(288.38,291.91) v1(319.87,291.91) 319.87,273.66 L4.1 L4.1@288.38,273.66 ; v1(909.13,433.17) v1(909.13,464.66) 927.38,464.66 C3.1 927.38,433.17 v1(909.13,433.17) ; v1(925.13,644.17) 943.38,644.17 C28.2 943.38,675.66 v1(925.13,675.66) v1(925.13,644.17) ; C4.2@1101.13,447.91 1116.87,463.66 v1(1135.13,463.66) v1(1135.13,432.17) 1116.87,432.17 C4.2@1101.13,447.91 ; C30.2@1161.13,966.91 1176.87,951.17 v1(1195.13,951.17) v1(1195.13,982.66) 1176.87,982.66 C30.2@1161.13,966.91 ; C17.1@1470.13,105.91 v1(1495.13,80.91) v1(1495.13,111.91) 1470.13,111.91 C17.1@1470.13,105.91
  Top Layer w40: v1@932.63,148.42 997.13,148.42 v1(980.62,131.91) ; 1035.43,148.91 v1(1091.62,148.91) 1074.62,131.91 v1(1048.62,131.91) ; v1(1459.13,509.4) v1(1459.13,477.91) v1(1459.13,446.41) 1459.13,423.91 v1@1461.13,421.91 ; v1@1463.61,504.91 C6.2 ; v1@1465.13,458.91 C5.1
  Top Layer w60: T1.3@836.1,737.91 C26.2
  other v1: 1789,26 1865,26 1727,38 28,39 75,39 115,39 157.57,39 319,39 403.5,39 558,39 267,40 205,41 640,41 795,41 876.22,41 1031.22,41 1112.44,41 1267.44,41 1348.66,41 1503.66,41 481.78,42.04 718,42.04 954.22,42.04 1190.44,42.04 1426.66,42.04 1589,42 1657.96,42.04 1549,56 364.27,60.99 600.49,60.99 836.71,60.99 1072.93,60.99 1309.15,60.99 1760,61 1801,61 1845,61 181,69 1722.53,71 239,75 1154.1,75 1602,76 292,77 447,82 893,83 502,84 661.54,85 1010,85 558,89 708,92 764,92 1054,93.86 946,95 1311.69,95 394.79,96 179,100 605,100 1116.33,100.67 344,102.35 1721,103.35 807.18,120.05 866.24,120.05 1161.51,120.05 1311.63,129 28,131.91 148,132 90.8,133 486,136 1723,136 206.19,141 244,140.91 304.13,141 368,142 602,144 648,144 777,144 738,145 699,146 945.62,148.91 837.71,150 898,150 1145,150 1775,151 1824,151 1870.17,151 1692,156 1234.13,157 363,254 28,254.91 79,254.66 132,255 175,254.91 212,254.66 560.13,257.31 1143,262.26 257.13,265.73 780,271 657,272 1747,274 1788,274 1830,274 1869,274 529.13,276.91 1692,278 1197.13,280.41 1313,279.57 183,289 364.27,297.21 600.49,297.21 1131.98,297.21 1722,297 657,310 425.13,315 1312,315 485.13,317.29 780,316.7 1584.13,316.91 246.16,319 1080,319 1197,321 181,322 1664.48,324 1720,335 1152,340 664,345 28,348 60,348 1312,352 1611,352 98.52,356.27 157.57,356.27 275.68,356.27 334.74,356.27 393.79,356.27 452.85,356.27 511.9,356.27 570.96,356.27 630.02,356.27 1102.46,356.27 780,361 1196,361 1785,363.91 1840.64,364.91 1730,366 1652,371 683,381.91 1286,383 1695,386 208,387 748.13,387 1220,390 1143,391 1080,393 1255.38,401 1611,402 68.99,415.32 128.05,415.32 187.1,415.32 246.16,415.32 305.21,415.32 364.27,415.32 423.32,415.32 482.38,415.32 541.43,415.32 600.49,415.32 659.54,415.32 718.6,415.32 777.65,415.32 1309.15,415.32 1663.48,415.32 1722.53,415.32 1781.59,415.32 1840.64,415.32 1182,425 1252,444 1612,449 1169,471 1215,471 209,473 1288,472.91 1698,473 44,474.38 98.52,474.38 157.57,474.38 275.68,474.38 334.74,474.38 393.79,474.38 452.85,474.38 511.9,474.38 570.96,474.38 630.02,474.38 689.07,474.38 748.13,474.38 807.18,474.38 1338.68,474.38 1397.73,474.38 1633.95,474.38 1752.06,474.38 1811.12,474.38 1870.17,474.38 984.13,505 1339.36,514 171,524 1656,526 250,531 1612,532 68.99,533.43 128.05,533.43 305.21,533.43 364.27,533.43 423.32,533.43 482.38,533.43 541.43,533.43 600.49,533.43 659.54,533.43 718.6,533.43 777.65,533.43 836.71,533.43 1781.59,533.43 1840.64,533.43 1000.78,541 1475,546 210.13,549.91 1698.31,549.91 42,582 1149,584 1192.87,584 1237,584 1474,591 98.52,592.49 157.57,592.49 275.68,592.49 334.74,592.49 393.79,592.49 452.85,592.49 511.9,592.49 570.96,592.49 630.02,592.49 689.07,592.49 748.13,592.49 807.18,592.49 866.24,592.49 925.29,592.49 984.35,592.49 1633.95,592.49 1752.06,592.49 1811.12,592.49 1870.17,592.49 1014,603 210,612 1610,615.91 1164,624.66 1698.31,625.36 36,640.91 423.32,651.54 482.38,651.54 541.43,651.54 600.49,651.54 659.54,651.54 718.6,651.54 777.65,651.54 836.71,651.54 1604.42,651.54 1663.48,651.54 1722.53,651.54 1781.59,651.54 1840.64,651.54 1172,663 797.13,683 856,683 892,688 1222,698 654,708.15 1698,709 748.13,710.6 1279.62,710.6 1338.68,710.6 1397.73,710.6 1456.79,710.6 1515.84,710.6 1574.9,710.6 1633.95,710.6 1752.06,710.6 1811.12,710.6 1870.17,710.6 701,718.5 1246.11,730 43,734 177,734.91 220,735 653,756.06 718.6,769.65 1309.15,769.65 1368.2,769.65 1427.26,769.65 1486.31,769.65 1545.37,769.65 1604.42,769.65 1781.59,769.65 1840.64,769.65 1268,771 833,773 794,774 882,774.32 1698.31,774.32 178,777 222,779 759,782 654,805.89 178,819 220,819 1279,820 702,821 1329.13,825 1397.73,828.71 1456.79,828.71 1515.84,828.71 1574.9,828.71 1633.95,828.71 1752.06,828.71 1811.12,828.71 1870.17,828.71 1700,840 654,848 742,850 1340.13,864.91 659.54,887.76 718.6,887.76 1427.26,887.76 1486.31,887.76 1545.37,887.76 1604.42,887.76 1663.48,887.76 1722.53,887.76 1781.59,887.76 1840.64,887.76 1372,898.91 1222.88,908 1289,909 1700,921 157.57,946.82 630.02,946.82 689.07,946.82 744,946.91 1279.62,946.82 1338.68,946.82 1397.73,946.82 1456.79,946.82 1515.84,946.82 1574.9,946.82 1633.95,946.82 1752.06,946.82 1811.12,946.82 1870.17,946.82 209,948 57,950 106,951.17 240,974 1246.16,987 1726,990 660.54,990.91 748.13,997 1391,996.72 1465.13,998 1618,1000 1666,1001.22 809,1004 68.99,1005.87 128.05,1005.87 600.49,1005.87 1309.15,1005.87 1545.37,1005.87 1781.59,1005.87 1840.64,1005.87 355,1013 250.48,1034.17 322,1033.85 406.34,1034.17 481.78,1034.17 558.69,1033.85 642.56,1034.17 718,1034.17 794.91,1033.85 878.78,1034.17 954.22,1034.17 1115,1034.17 1190.44,1034.17 1267.35,1033.85 1351.22,1034.17 1426.66,1034.17 1503.57,1033.85 1588,1034.17 182,1035 1727,1037 1033,1038 1814,1039
  other v2: 1084.82,769.61 1128.13,769.61 1171.43,769.61 1084.82,812.91 1128.13,812.91 1171.43,812.91 1084.82,856.22 1128.13,856.22 1171.43,856.22
NetC8_2: C8.2 C9.1 C13.2 C14.1 FB1.2 L1.2 | length 210.7
  Top Layer w20: C9.1 985.13,303.91 1023.13,341.91 FB1.2
  Top Layer w39: C14.1 C13.2 C8.2 C9.1
NetC10_2: C10.2 C11.1 C15.2 C16.1 FB2.2 L2.2 | length 206.5
  Top Layer w20: C15.2 1510.13,319.91 1520.13,329.91 1520.13,333.17 1531.37,344.41 1534.63,344.41 FB2.2
  Top Layer w40: C10.2 C11.1 C16.1 C15.2
NetC19_1: C19.1 D1.1 J1.1 L4.2 | length 208.3
  Top Layer w40: J1.1@129.87,197.91 L4.2 C19.1@338.13,197.91
NetC19_2: C19.2 U1.2 | length 28
  Top Layer w40: C19.2@406.13,197.91 U1.2@434.13,197.91
NetC20_1: C20.1 U1.5 | length 28
  Top Layer w40: U1.5@539.13,199.91 C20.1@567.13,199.91
NetC20_2: C20.2 U3.1
NetC21_1: C21.1 L1.1 U3.3 | length 51
  Top Layer w40: U3.3@786.13,206.91 L1.1
NetC21_2: C21.2 U2.2 | length 38.7
  Top Layer w40: C21.2@936.13,206.91 U2.2
NetC22_1: C22.1 U2.5 | length 20
  Top Layer w40: U2.5@1076.13,205.91 C22.1@1096.13,205.91
NetC22_2: C22.2 U4.1
NetC23_1: C23.1 L2.1 U4.3 | length 51
  Top Layer w40: U4.3@1318.13,221.91 L2.1
NetC23_2: C23.2 D2.1 J2.1 L3.1 L5.2 | length 302.5
  Top Layer w40: L3.1 L5.2 1650.55,221.91 cw(c1650.55,208.55) 1660,218 ccw(c1673.04,231.04) 1673.04,212.6 J2.1
NetC24_1: C24.1 C25.1 D3.1 T1.1 | length 237.3
  Top Layer w50: C24.1@432.07,847.97 473,847.97 ; D3.1 463.12,857.85 473,847.97 ; T1.1 473,847.97
NetC24_2: C24.2 C25.2 C31.2 FB5.1 T1.2 | length 246.2
  Top Layer w40: FB5.1 C31.2
  Top Layer w50: C24.2@434.07,729.86 T1.2
  Top Layer w60: FB5.1@370.09,720.91 C24.2
NetC26_1: C26.1 C27.1 FB3.2 U5.13 U5.15 U5.16 | length 217.1
  Top Layer w8: 1055.13,924.91 1055.13,983.91 1063.13,991.91 1122.77,991.91 1128.63,986.06 1128.63,907.9 U5.13
NetC30_1: C30.1 U5.14 | length 51.1
  Top Layer w14: U5.14 C30.1@1102.54,958.5
NetC31_1: C31.1 D3.2 FB4.2 | length 119.8
  Top Layer w40: C31.1 FB4.2 351,943.12 D3.2
NetFB4_1: FB4.1 P1.1 P1.2 TVS1.1 | length 358.2
  Top Layer w40: TVS1.1 288,875 FB4.1
  Top Layer w50: P1.1 P1.1@90.8,880.53
  Top Layer w59.06: P1.2 P1.1 274.82,884.18 FB4.1@282,877
NetFB5_2: FB5.2 P1.3 TVS1.2 | length 270.2
  Top Layer w50: P1.3 270.18,684.18 288,702 TVS1.2
NetNT1_2: NT1.2 U5.10 | length 43.2
  Top Layer w10: U5.10@1223.43,864.91 NT1.2
NetR1_1: R1.1 T1.4 | length 72
  Top Layer w40: T1.4@801.13,874.89 R1.1
Vin: C7.2 C12.1 C17.2 C18.1 FB3.1 L3.2 R1.2 | length 230.3
  Top Layer w30: C7.2@1397.93,108.91 1397.93,110.72 1448.13,160.91 C17.2
  Top Layer w37: C17.2@1453.63,160.91 L3.2
  Top Layer w40: R1.2 FB3.1 ; C18.1 C12.1
pads on no net: U5.2 U5.4 U5.5 U5.8 U5.9 U5.11 U5.12 U5.17 U5.18 U5.19

## Polygon pours and split planes (outlines as drawn)
GND on Bottom Layer "Bottom Layer-GND" (solid, pour order 2): 0,1078.74 1897.64,1078.74 1897.64,0 0,0
GND on Top Layer "Top Layer-No Net" (solid, pour order 0): 0,1078.74 1897.64,1078.74 1897.64,0 0,0

## Other copper
Top Layer:
  rectangle net Vin: 842.13,964.91 925.13,988.91
  rectangle net +5V: 1047.13,674.91 1083.13,732.91
  rectangle net +5V: 1016.13,639.91 1051.13,765.91
  rectangle net NetC26_1: 988.13,857.91 1048.62,899.91
  rectangle net NetC26_1: 945.62,891.91 1084.13,932.91
  rectangle net GND: 1604.13,140.91 1642.13,180.91
  rectangle net GND: 1600.13,91.91 1642.13,131.91
  pour cut-out: 390,995 390.47,994.53 427,994.53 427,980.87 425.13,979 424.13,980 392,980
  pour cut-out: 162,835 161,834 161,718 160,718 153,711 129,735 129,839 153,839 159,845
  pour cut-out: 911.13,819.91 891.09,819.91 890,821 891,822 891,847.97 915.16,847.97 917.13,846
  pour cut-out: 518,819 519.78,817.22 637.42,817.22 637.42,758 638,757.42
  pour cut-out: 457.57,247.16 457.57,215.66 441.82,199.91 441.82,152.67 528.43,152.67 528.43,247.16
  pour cut-out: 990.57,254.16 1061.43,254.16 1061.43,159.67 974.82,159.67

## Silkscreen, mask and mechanical layers (free items; w line width, h text height)
Top Overlay:
  region: 591,531 577,487 407,523 571,463 561,421 605,407 571,233 631,425 589,435 605,505 673,489 663,441 857,401 691,457 701,503 657,515 691,689 635,521
  pour cut-out: 165,718.5
  lines w10: 52,886.73 15,886.73 15,783 154,783 154,884.18 87.15,884.18
  text "+" at 157.57,946.82 h300 r90
  text "-" at 130,543 h300 r90
  text "6-12 V" at 175.68,372 h100 r90
Bottom Overlay:
  region: 333,728 319,684 149,720 313,660 303,618 347,604 313,430 373,622 331,632 347,702 415,686 405,638 599,598 433,654 443,700 399,712 433,886 377,718
  lines w20: 123,784 168,784 168,887 124,887
  text "+" at 306,898 h500 r90
  text "PW-Sat2" at 1801,729 h400
  text "X 2018" at 1715,566 h200
  text "-" at 170,481 h500 r90
  text "-" at 1179,247 h500 r180
  text "+" at 1191,195 h400 r90
  text "4" at 1008,129 h400
  text "MHz" at 759,122 h400
  text "433" at 1731,118 h400
Top Solder:
  rectangle: 874,925 889,963
  rectangle: 842.13,959.91 925.13,988.91

## Text inside footprints (layer, text, board x,y; h text height)
C1: Mechanical 19 "-" at 1067.13,532.91 h15 r180
C2: Mechanical 19 "-" at 1540.13,572.91 h15 r180
C3: Mechanical 19 "-" at 938.13,443.91 h10
C4: Mechanical 19 "-" at 1035.13,443.91 h10
C5: Mechanical 19 "-" at 1490.13,453.91 h10
C6: Mechanical 19 "-" at 1560.13,509.91 h10 r180
C7: Mechanical 17 "d" at 1248,104 h15; Mechanical 19 "-" at 1248,104 h15
C8: Mechanical 19 "-" at 924.13,368.91 h10 r270
C9: Mechanical 19 "-" at 980.13,298.91 h10 r90
C10: Mechanical 19 "-" at 1364.13,384.91 h10 r270
C11: Mechanical 19 "-" at 1420.13,314.91 h10 r90
C12: Mechanical 17 "d" at 1541.13,155.91 h10; Mechanical 19 "-" at 1541.13,155.91 h10
C13: Mechanical 19 "-" at 878.13,368.91 h10 r270
C14: Mechanical 19 "-" at 842.13,298.91 h10 r90
C15: Mechanical 19 "-" at 1502.13,384.91 h10 r270
C16: Mechanical 19 "-" at 1466.13,314.91 h10 r90
C17: Mechanical 17 "d" at 1464.13,95.91 h10 r90; Mechanical 19 "-" at 1464.13,95.91 h10 r90
C18: Mechanical 17 "d" at 1541.13,106.91 h10; Mechanical 19 "-" at 1541.13,106.91 h10
C19: Mechanical 19 "-" at 337.13,192.91 h10
C20: Mechanical 19 "-" at 563.13,194.91 h10
C21: Mechanical 19 "-" at 870.13,201.91 h10
C22: Mechanical 19 "-" at 1096.13,201.04 h10
C23: Mechanical 19 "-" at 1403.13,216.91 h10
C24: Mechanical 19 "-" at 420.13,852.91 h15 r270
C25: Mechanical 19 "-" at 489.13,824.91 h10 r270
C26: Mechanical 19 "-" at 961.13,869.91 h15 r270
C27: Mechanical 19 "-" at 1008.13,929.91 h10 r90
C28: Mechanical 19 "-" at 1024.13,664.91 h10 r180
C29: Mechanical 19 "-" at 1084.13,639.91 h15
C30: Mechanical 19 "-" at 1094.13,956.91 h10
C31: Mechanical 17 "d" at 346,831 h10 r270; Mechanical 19 "-" at 346,831 h10 r270
D1: Mechanical 19 "-" at 261.13,210.73 h10 r90
D2: Mechanical 19 "-" at 1651.13,235.21 h10 r90
D3: Mechanical 19 "-" at 468,965 h15 r180
FB1: Mechanical 19 "-" at 1008.13,410.91 h10 r270
FB2: Mechanical 19 "-" at 1540.13,424.91 h10 r270
FB3: Mechanical 19 "-" at 905.13,931.91 h10
FB4: Mechanical 17 "d" at 291,883 h10; Mechanical 19 "-" at 291,863 h10
FB5: Mechanical 17 "d" at 351,704 h10 r180; Mechanical 19 "-" at 351,724 h10 r180
J1: Mechanical 19 "-" at -354,175.21 h60
J2: Mechanical 19 "-" at 2252.95,231.3 h60 r180
L1: Mechanical 19 "-" at 852.13,196.91 h10 r90
L2: Mechanical 19 "-" at 1384.13,211.91 h10 r90
L3: Mechanical 19 "-" at 1492.13,231.91 h10 r270
L4: Mechanical 19 "-" at 289.13,267.91 h10 r270
L5: Mechanical 19 "-" at 1542.13,291.91 h10 r270
NT1: Mechanical 19 "-" at 1374.13,874.91 h20 r180
P1: Mechanical 19 "-" at 57.15,929.18 h60 r270
R1: Mechanical 19 "-" at 801.13,931.91 h10
SHIELD1: Mechanical 17 "d" at 2008,3184 h60 r180; Mechanical 19 "-" at 2008,3174 h60 r180
SHIELD2: Mechanical 17 "d" at 922.22,517.91 h60; Mechanical 19 "-" at 922.22,527.91 h60
T1: Mechanical 17 "d" at 693.13,783.91 h11.81; Mechanical 19 "-" at 694.13,782.91 h11.81
TVS1: Mechanical 17 "d" at 293,824 h10 r270; Mechanical 19 "-" at 273,824 h10 r270
U1: Mechanical 19 "-" at 480.13,259.91 h20 r270
U2: Mechanical 19 "-" at 1013.13,266.91 h20 r270
U3: Mechanical 19 "-" at 698.13,267.97 h25
U4: Mechanical 19 "-" at 1230.13,276.91 h25
U5: Mechanical 19 "-" at 1143.13,722.91 h25 r90